# Allegro board SAFELIGHT1_1.brd
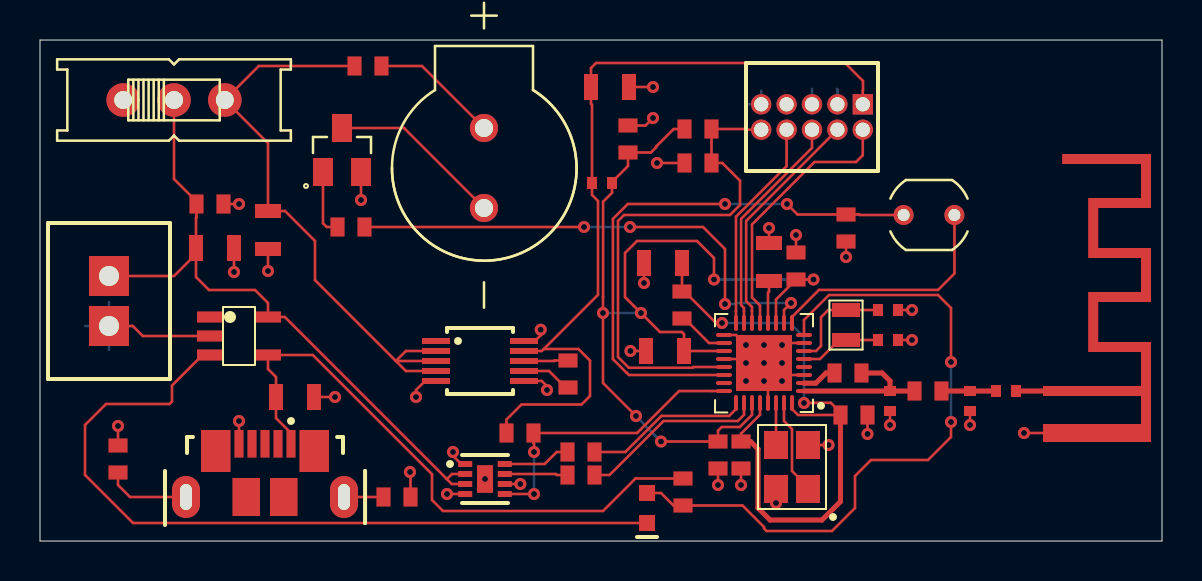
[diagram p0: board, top side]
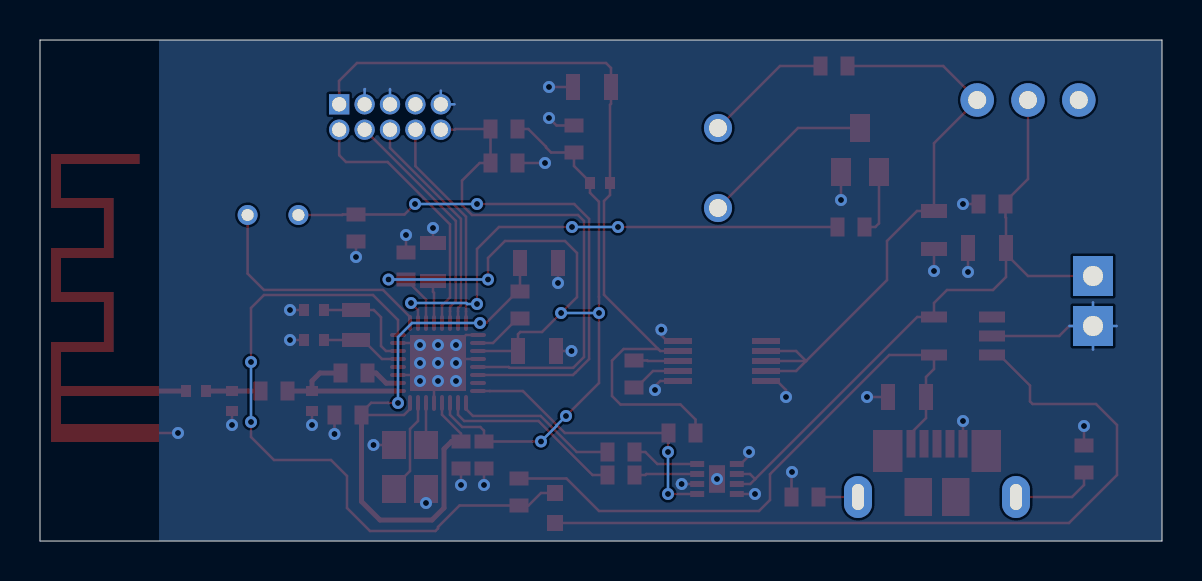
[diagram p1: board, bottom side, seen from below]

Outline 56.1 x 25.05 mm; copper layers: TOP, BOTTOM. Coordinates in mm from the lower left corner of the outline.
Outline path: 0,25.05 0,0 56.1,0 56.1,25.05 0,25.05

## Design rules (mm)
constraint set DEFAULT: min track width 0.127

## Placement (name value [footprint] x y rotation side)
A1  TI AN043  [AN043_PATCH_ANTENNA]  50.65 4.45 270 top
BJT1  MMBT3904  [SOT95P240X120-3N]  15.1 19.55 0 top
BUZ1  AT-1127-ST-2-R  [XDCR_AT-1127-ST-2-R]  22.2 18.65 90 top
C1  12p  [0402_C]  42.4 10.05 0 top
C2  12p  [0402_C]  42.4 11.55 0 top
C3  1uF  [0805_C]  36.45 13.95 270 top
C4  100nF  [0603_C]  37.8 13.75 90 top
C5  100nF  [0603_C]  33.9 4.3 270 top
C6  10uF  [0805_C]  31.25 9.5 180 top
C7  10uF  [0805_C]  31.15 13.9 180 top
C8  100nF  [0603_C]  29.4 20.1 90 top
C9  100nF  [0603_C]  40.7 6.3 0 top
C10  100nF  [0603_C]  35.05 4.3 270 top
C11  12pF  [0402_C]  48.3 7.5 0 top
C12  1.2pF  [0402_C]  42.5 7 270 top
C13  1.2pF  [0402_C]  46.5 7 270 top
C14  100nF  [0603_C]  32.9 18.9 180 top
C15  330nF  [0603_C]  26.4 8.35 270 top
C16  10uF  [0805_C]  28.5 22.7 0 top
C17  10uF  [0805_C]  11.4 15.55 270 top
C18  1uF  [0805_C]  8.75 14.65 0 top
C19  100nF  [0603_C]  8.5 16.85 0 top
C20  1uF  [0805_C]  12.75 7.2 0 top
CHC1  MAXIM MAX1555  [SMD_MAX1555]  9.95 10.25 270 top
CON1  JST B2B-XH-A LF SN  [B2B-XH-A]  3.45 12 90 top
CYS1  24MHz  [TSX-3225_XTAL]  37.6 3.7 90 top
CYS2  32.768MHz  [SC-20S_XTAL]  40.3 10.8 90 top
FG1  MAXIM MAX17048  [MAX17048]  22.25 3.1 270 top
J1  SAMTEC FTSH-105-01-L-D-K  [SAMTEC_FTSH-105-01-L-D-K]  38.6 21.2 180 top
L1  10uH  [0603_L]  32.1 11.8 90 top
L2  FerriteBead  [0402_L]  28.1 17.9 0 top
L3  15nH  [0603_L]  40.4 8.4 0 top
L4  2nH  [0603_L]  44.4 7.5 0 top
LED1  GEN  [0603_LED]  30.35 1.65 90 top
LS1  -  [PDV-P8001]  44.45 16.3 180 top
M1  TI CC2640R2F RSM  [CC2640R2FRSM]  36.2 8.9 90 top
R1  33  [0603_R]  16.4 23.75 0 top
R2  2k  [0603_R]  15.55 15.7 180 top
R3  2k  [0603_R]  40.3 15.65 270 top
R4  100K  [0603_R]  32.9 20.6 0 top
R5  33K  [0603_R]  3.9 4.1 270 top
R6  3.3K  [0603_R]  24 5.4 0 top
R7  220  [0603_R]  27.05 3.3 0 top
R8  220  [0603_R]  27.05 4.45 0 top
R9  200  [0603_R]  32.15 2.45 270 top
R10  33K  [0603_R]  17.85 2.2 0 top
SW1  SIS  [EG1218]  6.7 22.05 0 top
USB1  MOLEX 1051640001  [MOLEX_105164-0001]  11.25 3.75 0 top
VR1  MAXIM MAX1759  [MAX1759]  22 9 270 top

## Library data of the parts
A1 = ANTENNA
BJT1 = MMBT3904
BUZ1 = AT-1127-ST-2-R
C1-C20 = CAP
CHC1 = MAX1555
CON1 = JST B2B-XH-A LF SN
CYS1 = CRYSTAL_24M
CYS2 = CRYSTAL_32768
FG1 = MAXIM MAX17048
J1 = SAMTEC FTSH-105-01-L-D-K
L1 L3 L4 = IND
L2 = FerriteBead
LED1 = LED
LS1 = PDV-P8001
M1 = CC2640
R1-R10 = RES
SW1 = SIS
USB1 = MOLEX 1051640001
VR1 = MAX1759

## Footprints (pads in the part's own frame, mm; a bottom-side part is the same pattern mirrored in y, then rotated)
0402_C
  rect 0.5x0.6 smd: 1(-0.5,0) 2(0.5,0)
0402_L
  rect 0.5x0.6 smd: 1(-0.5,0) 2(0.5,0)
0603_C
  rect 0.7x0.95 smd: 1(-0.675,0) 2(0.675,0)
0603_L
  rect 0.7x0.95 smd: 1(-0.675,0) 2(0.675,0)
0603_LED
  rect 0.8x0.8 smd: 1(-0.75,0) 2(0.75,0)
0603_R
  rect 0.7x0.95 smd: 1(-0.675,0) 2(0.675,0)
0805_C
  rect 0.7x1.3 smd: 1(-0.95,0) 2(0.95,0)
AN043_PATCH_ANTENNA
  rect 0.9x0.5 smd: 1(-0.95,-0.25)
  rect 0.5x0.5 smd: 2(-3.05,-0.25)
B2B-XH-A
  rect 2x2 hole 1: 1(-1.25,0) 2(1.25,0)
CC2640R2FRSM
  rrect 0.2x0.8 smd: 1(-1.4,-2) 2(-1,-2) 3(-0.6,-2) 4(-0.2,-2) 5(0.2,-2) 6(0.6,-2) 7(1,-2) 8(1.4,-2) 24(-1.4,2)
  rrect 0.8x0.2 smd: 9(2,-1.4) 10(2,-1) 11(2,-0.6) 12(2,-0.2) 13(2,0.2) 14(2,0.6) 15(2,1) 16(2,1.4) 25(-2,1.4) 26(-2,1) 27(-2,0.6) 28(-2,0.2) 29(-2,-0.2) 30(-2,-0.6) 31(-2,-1) 32(-2,-1.4)
  rrect 0.2x0.8 smd rot 0.2: 17(1.4,2) 18(1,2) 19(0.6,2) 20(0.2,2) 21(-0.2,2) 22(-0.6,2) 23(-1,2)
  rect 2.8x2.8 smd: 33(0,0)
EG1218
  round 1.676 hole 0.9: O(-2.54,0) P(0,0) S(2.54,0)
MAX1759
  rect 0.3x1.4 smd: 1(-1,-2.2) 2(-0.5,-2.2) 3(0,-2.2) 4(0.5,-2.2) 5(1,-2.2) 6(1,2.2) 7(0.5,2.2) 8(0,2.2) 9(-0.5,2.2) 10(-1,2.2)
MAX17048
  rect 0.3x0.7 smd: 1(-0.75,-0.99) 2(-0.25,-0.99) 3(0.25,-0.99) 4(0.75,-0.99) 5(0.75,0.99) 6(0.25,0.99) 7(-0.25,0.99) 8(-0.75,0.99)
  rect 1.38x0.8 smd: 9(0,0)
MOLEX_105164-0001
  rect 0.45x1.38 smd: 1(1.3,1.11) 2(0.65,1.11) 3(0,1.11) 4(-0.65,1.11) 5(-1.3,1.11)
  rect 1.375x1.9 smd: P1(-0.938,-1.55) P2(0.938,-1.55)
  rect 1.475x2.1 smd: P3(-2.462,0.75) P4(2.462,0.75)
  oval 1.4x2.1 hole 0.6x1.3: S1(-3.95,-1.55) S2(3.95,-1.55)
PDV-P8001
  round 1 hole 0.6: 1(-1.27,0) 2(1.27,0)
SAMTEC_FTSH-105-01-L-D-K
  rect 1.016x1.016 hole 0.711: 1(-2.54,-0.635)
  round 1.016 hole 0.711: 2(-2.54,0.635) 3(-1.27,-0.635) 4(-1.27,0.635) 5(0,-0.635) 6(0,0.635) 7(1.27,-0.635) 8(1.27,0.635) 9(2.54,-0.635) 10(2.54,0.635)
SC-20S_XTAL
  rect 0.7x1.4 smd: 1(-0.75,0) 2(0.75,0)
SMD_MAX1555
  rect 0.55x1.3 smd: 1(-0.95,-1.45) 2(0,-1.45) 3(0.95,-1.45) 4(0.95,1.45) 5(-0.95,1.45)
SOT95P240X120-3N
  rect 1x1.4 smd: 1(-0.95,-1.1) 2(0.95,-1.1) 3(0,1.1)
TSX-3225_XTAL
  rect 1.4x1.2 smd: 1(-1.1,-0.8) 2(1.1,-0.8) 3(1.1,0.8) 4(-1.1,0.8)
XDCR_AT-1127-ST-2-R
  round 1.408 hole 0.9: N(-2,0) P(2,0)

## Nets
GND: A1.1(-) BJT1.2(E) C1.2(B) C2.2(B) C3.1 C4.2(B) C5.2(B) C6.2(B) C7.2(B) C8.2(B) C9.2(B) C10.2(B) C12.2(B) C13.2(B) C14.2(B) C16.2(B) C17.2(B) C18.2(B) C19.2(B) C20.2(B) CHC1.2 CON1.1 CYS1.2 CYS1.4 FG1.1 FG1.4 FG1.6 FG1.9 J1.3 J1.5 J1.9 M1.3 M1.7 M1.17 M1.20 M1.29 M1.33 R3.2(B) R5.1 R10.2(B) USB1.5 VR1.5 VR1.6 VR1.10
VCC: C16.1 J1.1 L2.1 R6.1 VR1.9
VDDR: C7.1 C9.1 C10.1 L1.2(B) M1.28 M1.32
VDDS: C4.1 C5.1 C6.1 C8.1 L2.2(B) M1.11 M1.19 M1.27 R4.1
ALRTN: FG1.5 M1.24 R6.2(B)
ANTENNA: A1.2 C11.2(B)
BAT+: C18.1 C19.1 CHC1.5 CON1.2 FG1.2 FG1.3(VDD) SW1.P
BUZ: M1.10 R2.1
BUZ_IN: BUZ1.P R1.2(B)
BUZZNEG: BJT1.3 BUZ1.N
CHG: CHC1.3 LED1.1(-)
CXN: C15.2(B) VR1.7
CXP: C15.1 VR1.8
DC: C20.1 CHC1.4 R9.1 USB1.1
DCDC_IN: C17.1 R1.1 SW1.S VR1.2(SHDN) VR1.3 VR1.4
DCDC_SW: L1.1 M1.18
DCOUPL: C3.2(B) M1.12
FILTER: C11.1 C13.1 L4.2(B)
LED: LED1.2 M1.8 R9.2(B)
RESET: C14.1 J1.10 M1.21 R4.2(B)
RF_N: L3.1 M1.2
RF_P: C12.1 L3.2(B) L4.1 M1.1
SCL: M1.26 R7.2(B)
SCL_OUT: FG1.7 R7.1
SDA: M1.25 R8.2(B)
SDA_OUT: FG1.8 R8.1
SENSOR_MTR: LS1.2(PS2) M1.22 R3.1
SENSOR_ON: LS1.1 M1.9
TCKC: J1.4 M1.14
TDI: J1.8 M1.16
TDO: J1.6 M1.15
TMSC: J1.2 M1.13
TRB: BJT1.1 R2.2(B)
X24M_N: CYS1.3 M1.30
X24M_P: CYS1.1 M1.31
X32K_Q1: C1.1 CYS2.1 M1.5
X32K_Q2: C2.1 CYS2.2(B) M1.6(X32K_Q2)
N183563: R5.2(B) USB1.S1
N183606: R10.1 USB1.S2(SHIELD2)

Pads without a net: CHC1 1; J1 7; M1 4 23; SW1 O; USB1 2 3 4 P1 P2 P3 P4; VR1 1

## Via types
v1: diameter 0.6, hole 0.3, TOP to BOTTOM, 60 vias

## Routing (per net, layer and track width the routed paths; a pad name or vN(x,y) marks a point on that pad's centre or on a via; arc(x,y) is an arc through that point)
GND: length 51.2
  TOP w0.127: FG1.6 v1(24.02,2.85) ; v1(25.35,7.55) 25.35,7.74 25.09,8 VR1.6 ; C2.2 v1(43.6,11.55) ; R10.2 18.53,3.43 v1(18.5,3.45) ; v1(37.1,8) 37.4,8.3 M1.3 ; v1(20.65,4.45) 20.65,4.26 21.06,3.85 FG1.1 ; CHC1.2 5.14,10.25 4.64,10.75 CON1.1 ; BJT1.2 v1(16.05,17.05) ; R5.1 v1(3.9,5.75) ; v1(37.8,15.3) C4.2 37.8,14.38 ; M1.7 37.2,9.9 v1(37.1,9.8) ; C8.2 30.28,20.78 v1(30.65,21.15) ; M1.17 34.8,10.3 v1(35.3,9.8) ; C19.2 v1(9.95,16.85) ; M1.20 35.1,9.1 v1(35.3,8.9) ; CYS1.4 v1(36.8,1.9) ; C20.2 v1(14.75,7.2) ; C7.2 v1(30.2,12.9) ; C16.2 v1(30.65,22.7) ; 32.22,18.9 v1(30.85,18.9) ; C1.2 v1(43.6,10.05) ; v1(25.03,10.57) 25.03,10.28 24.75,10 VR1.10 ; USB1.5 v1(9.95,6) ; C17.2 v1(11.4,13.5) ; R3.2 v1(40.3,14.2) ; C3.1 v1(36.45,15.65) ; VR1.5 19.25,8 18.8,7.55 v1(18.8,7.2) ; M1.29 36.4,7.8 v1(36.2,8) ; C6.2 v1(29.52,9.5) ; 35.05,3.62 v1(35.05,2.8) ; 33.9,3.62 v1(33.9,2.8) ; C12.2 v1(42.5,5.8) ; CYS1.2 v1(39.43,4.8) ; FG1.4 v1(20.35,2.35) ; C9.2 v1(41.38,5.35) ; C18.2 v1(9.7,13.45) ; v1(49.2,5.4) A1.1 ; v1(46.5,5.8) C13.2
  BOTTOM w0.127: J1.5 38.6,22.6 ; 36.06,22.52 J1.9 35.37,21.84 ; CON1.1 3.45,11.93 ; CON1.1 2.27,10.75 ; CON1.1 3.45,9.57 ; CON1.1 4.63,10.75 ; J1.3 39.87,22.58 39.85,22.6
  vias: v1(22.25,3.1) v1(35.3,8) v1(36.2,9.8) v1(36.2,8.9) v1(37.1,8.9)
VCC: length 41.3
  TOP w0.127: 25.19,9.6 25.09,9.5 VR1.9 ; 25.19,9.6 26.92,9.6 27.5,9.02 27.5,7.25 27.08,6.83 24.08,6.83 23.33,6.08 R6.1 ; 25.19,9.6 27.9,12.31 27.9,17 27.6,17.3 L2.1 27.6,21.81 27.55,21.86 C16.1 27.55,23.65 27.8,23.9 40.25,23.9 41.15,23 41.15,22.54 41.14,22.53 J1.1
VDDR: length 32.1
  TOP w0.127: C7.1 L1.2 32.22,12.48 33.8,10.9 v1(34.1,10.9) ; M1.32 37.6,6.6 37.9,6.3 40.02,6.3 40.02,6.43 39.54,6.91 38.7,6.91 38.69,6.9 v1(38.2,6.9) ; M1.28 36,6.32 35.05,5.37 C10.1
  TOP w0.25: C10.1 35.53,4.98 35.9,4.6 35.9,1.65 36.5,1.05 39.1,1.05 40.02,1.98 40.02,6.3
  BOTTOM w0.127: v1(38.2,6.9) 38.2,10.2 37.5,10.9 v1(34.1,10.9)
VDDS: length 50.7
  TOP w0.127: M1.19 C6.1 32.2,10.34 32.09,10.45 31,10.45 v1(30.05,11.4) 29.7,11.75 29.7,11.75 29.25,12.19 29.25,14.4 29.85,15 32.85,15 33.7,14.15 v1(33.7,13.08) ; v1(29.8,6.25) 28.15,7.9 v1(28.15,11.4) 28.15,12.2 28.15,12.2 28.15,16.96 28.6,17.41 L2.2 28.6,17.95 29.4,18.75 C8.1 30.55,19.43 30.8,19.68 30.8,19.72 31.68,20.6 32.22,20.6 ; v1(38.67,13.08) C4.1 36.8,12.08 M1.11 ; v1(31.05,4.98) C5.1 33.9,5.52 34.08,5.7 34.99,5.7 35.6,6.31 M1.27
  BOTTOM w0.127: v1(29.8,6.25) 30.28,5.77 30.28,5.75 v1(31.05,4.98) ; v1(38.67,13.08) v1(33.7,13.08) ; v1(30.05,11.4) v1(28.15,11.4)
ALRTN: length 14.9
  TOP w0.127: M1.24 33.61,7.5 33.61,7.5 31.95,7.5 29.86,5.4 R6.2 24.67,4.9 24.7,4.88 v1(24.7,4.45) ; v1(24.7,2.35) FG1.5
  BOTTOM w0.127: v1(24.7,2.35) v1(24.7,4.45)
ANTENNA: length 1.6
  TOP w0.25: C11.2 A1.2
BAT+: length 33.3
  TOP w0.127: SW1.P 6.7,18.1 7.83,16.98 C19.1 7.83,16.18 7.8,16.16 C18.1 7.8,14.35 ; 20.34,3.09 20.34,3.1 12.24,11.2 CHC1.5 11.4,11.9 10.75,12.55 8.45,12.55 7.8,13.2 7.8,14.35 ; 20.34,3.09 20.59,2.85 FG1.3 ; 20.34,3.09 20.6,3.35 FG1.2 ; 7.8,14.35 6.7,13.25 CON1.2
BUZ: length 25.7
  TOP w0.127: v1(29.5,15.7) 33.15,15.7 34.25,14.6 v1(34.25,11.85) ; R2.1 v1(27.2,15.7) ; v1(37.55,11.9) 37.2,11.55 M1.10
  BOTTOM w0.127: v1(34.25,11.85) 34.74,11.85 34.79,11.9 v1(37.55,11.9) ; v1(29.5,15.7) v1(27.2,15.7)
BUZ_IN: length 6.4
  TOP w0.127: BUZ1.P 19.1,23.75 R1.2
BUZZNEG: length 8.8
  TOP w0.127: BUZ1.N 18.2,20.65 BJT1.3
CHG: length 39.8
  TOP w0.127: LED1.1 4.65,0.9 2.25,3.3 2.25,5.8 3.3,6.85 6.47,6.85 6.6,6.98 6.6,7.78 8.12,9.3 CHC1.3
CXN: length 2.5
  TOP w0.127: C15.2 26.28,7.68 25.45,8.5 VR1.7
CXP: length 2.2
  TOP w0.127: C15.1 25.73,9.03 25.71,9 VR1.8
DC: length 30.3
  TOP w0.127: USB1.1 12.55,5.39 11.8,6.14 C20.1 11.8,8.2 11.4,8.6 CHC1.4 13.64,9.3 19.6,3.34 19.6,2.05 20.15,1.5 28.15,1.5 29.78,3.12 R9.1
DCDC_IN: length 30.7
  TOP w0.127: 17.79,9 VR1.3 ; 17.79,9 13.75,13.04 13.75,15 12.25,16.5 C17.1 11.4,19.89 SW1.S 10.94,23.75 15.72,23.75 ; 17.79,9 18.29,9.5 VR1.2 ; 17.79,9 18.29,8.5 VR1.4
DCDC_SW: length 2.6
  TOP w0.127: M1.18 33.45,9.9 32.22,11.12 32.1,11.12
DCOUPL: length 2.1
  TOP w0.127: M1.12 36.4,12.41 36.45,12.46 C3.2
FILTER: length 2.7
  TOP w0.127: C11.1 47.7,7.5
  TOP w0.25: 47.7,7.5 C13.1 45.08,7.5
LED: length 34.3
  TOP w0.127: v1(45.55,8.95) 45.55,11.65 44.9,12.3 39.45,12.3 38.2,11.05 M1.8 ; LED1.2 31.05,2.4 31.67,1.78 R9.2 35.12,1.78 36.2,0.7 36.2,0.63 36.33,0.5 39.6,0.5 40.75,1.65 40.75,3.25 41.55,4.05 44.4,4.05 45.55,5.2 v1(45.55,5.95)
  BOTTOM w0.127: v1(45.55,8.95) v1(45.55,5.95)
RESET: length 26
  TOP w0.127: J1.10 35.36,20.57 35.33,20.6 R4.2 C14.1 34.12,18.9 35,18.02 35,16.8 34.5,16.3 29.2,16.3 28.9,16 28.9,9.2 29.44,8.66 32.63,8.66 32.67,8.7 M1.21
RF_N: length 1.7
  TOP w0.25: M1.2 38.21,7.89 38.79,7.89 39.3,8.4 L3.1
RF_P: length 7.6
  TOP w0.25: L4.1 C12.1 ; C12.1 M1.1 ; C12.1 42.5,8 42.1,8.4 41.08,8.4
SCL: length 9.3
  TOP w0.127: M1.26 35.2,6.31 34.89,6 31.17,6 28.47,3.3 R7.2
SCL_OUT: length 3.2
  TOP w0.127: R7.1 25.83,3.3 25.78,3.35 FG1.7
SDA: length 8.3
  TOP w0.127: M1.25 34.8,6.6 34.46,6.25 31.07,6.25 29.27,4.45 R8.2
SDA_OUT: length 3.4
  TOP w0.127: R8.1 25.83,4.45 25.23,3.85 FG1.8
SENSOR_MTR: length 28
  TOP w0.127: v1(34.25,16.85) 29.39,16.85 28.65,16.11 28.65,9.09 29.34,8.41 29.34,8.41 29.45,8.3 M1.22 ; LS1.2 40.99,16.3 40.97,16.33 R3.1 37.88,16.33 v1(37.35,16.85)
  BOTTOM w0.127: v1(37.35,16.85) v1(34.25,16.85)
SENSOR_ON: length 12.3
  TOP w0.127: LS1.1 45.72,13.37 44.9,12.55 38.95,12.55 37.6,11.2 M1.9
TCKC: length 11.7
  TOP w0.127: J1.4 35.31,16 35.31,11.99 35.6,11.7 35.6,11.49 35.6,11.49 M1.14
TDI: length 10.7
  TOP w0.127: J1.8 37.33,18.74 34.8,16.21 34.8,11.49 34.8,11.49 M1.16
TDO: length 11.2
  TOP w0.127: M1.15 35.2,11.49 35.2,11.49 35.2,11.65 35.05,11.8 35.05,16.11 38.6,19.65 J1.6
TMSC: length 13.3
  TOP w0.127: J1.2 41.14,19.29 40.8,18.95 38.72,18.95 35.6,15.83 35.6,12.18 36,11.78 M1.13
TRB: length 3.4
  TOP w0.127: R2.2 14.33,15.7 14.15,15.88 BJT1.1
X24M_N: length 2.1
  TOP w0.127: CYS1.3 M1.30
X24M_P: length 4.8
  TOP w0.127: CYS1.1 38.4,2.7 37.6,3.5 37.6,5.6 37.2,6 M1.31
X32K_Q1: length 4.1
  TOP w0.127: M1.5 39,9.1 39.95,10.05 CYS2.1 C1.1
X32K_Q2: length 5.4
  TOP w0.127: C2.1 CYS2.2 39.41,11.55 39.05,11.19 39.05,9.75 38.8,9.5 M1.6
N183563: length 4.3
  TOP w0.127: USB1.S1 4.5,2.2 3.9,2.8 R5.2
N183606: length 2
  TOP w0.127: R10.1 USB1.S2

## Copper pours and planes (outline as drawn; the poured copper is in the pictures)
GND on BOTTOM: 0,25.05 0,0 50.15,0 50.15,25.05
ANTENNA on TOP (solid shape): 55.55,16.65 52.91,16.65 52.91,14.65 55.55,14.65 55.55,11.95 52.91,11.95 52.91,9.95 55.55,9.95 55.55,4.95 50.65,4.95 50.65,5.85 55.05,5.85 55.05,7.25 50.65,7.25 50.65,7.75 55.05,7.75 55.05,9.45 52.41,9.45 52.41,12.45 55.05,12.45 55.05,14.15 52.41,14.15 52.41,17.15 55.05,17.15 55.05,18.85 51.11,18.85 51.11,19.35 55.55,19.35
